# Altium PCB Sensor_Voltage_V1.PcbDoc
Units mm, origin at the board's own origin, x right, y up, seen from the top; angles counter-clockwise.
Board outline 59.5 x 69.4 mm, 2 copper layers (Top Layer, Bottom Layer), stack 1.58 mm thick; 129 components, 23 nets, 307 pads, 33 vias.
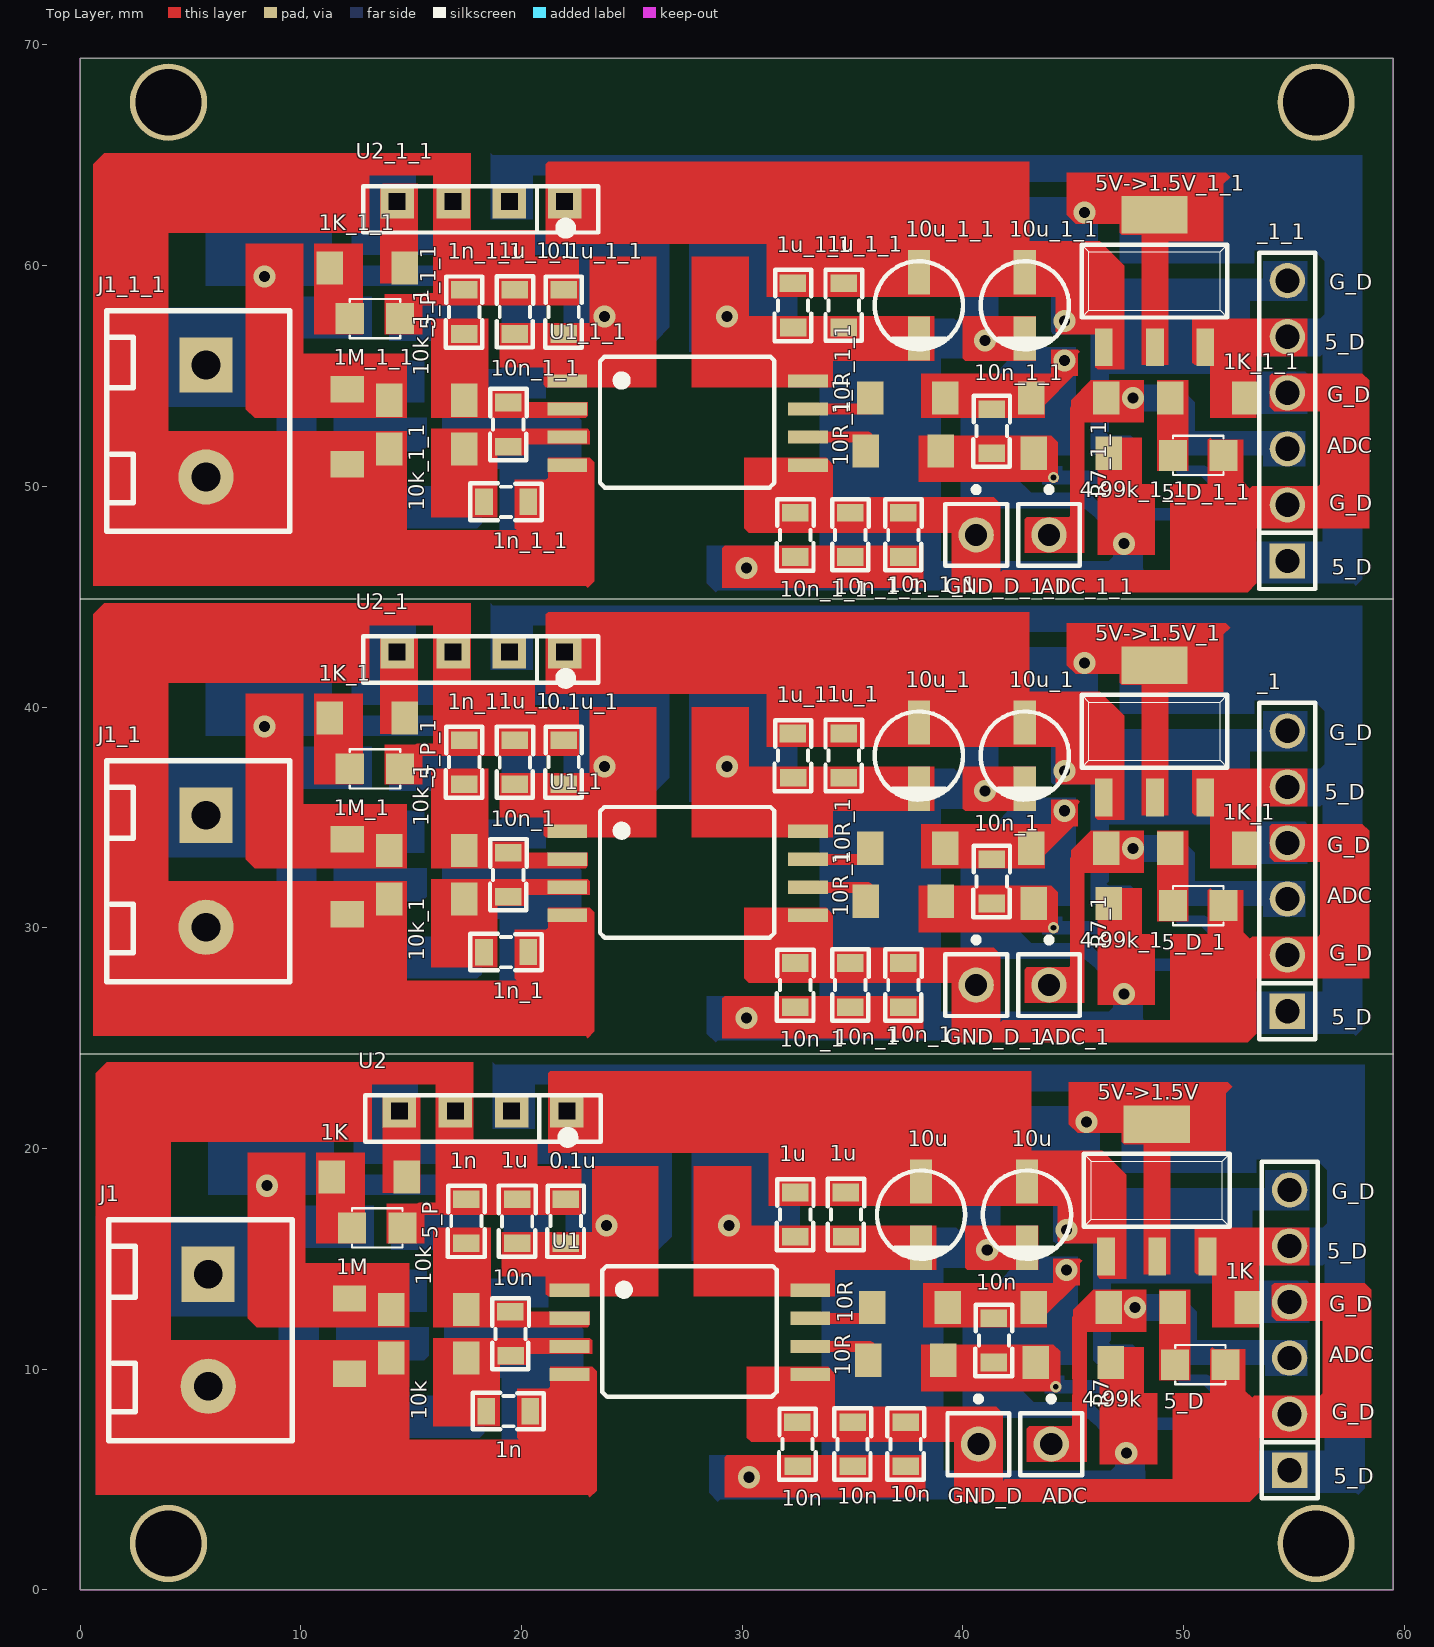
[diagram p0: Top Layer view]
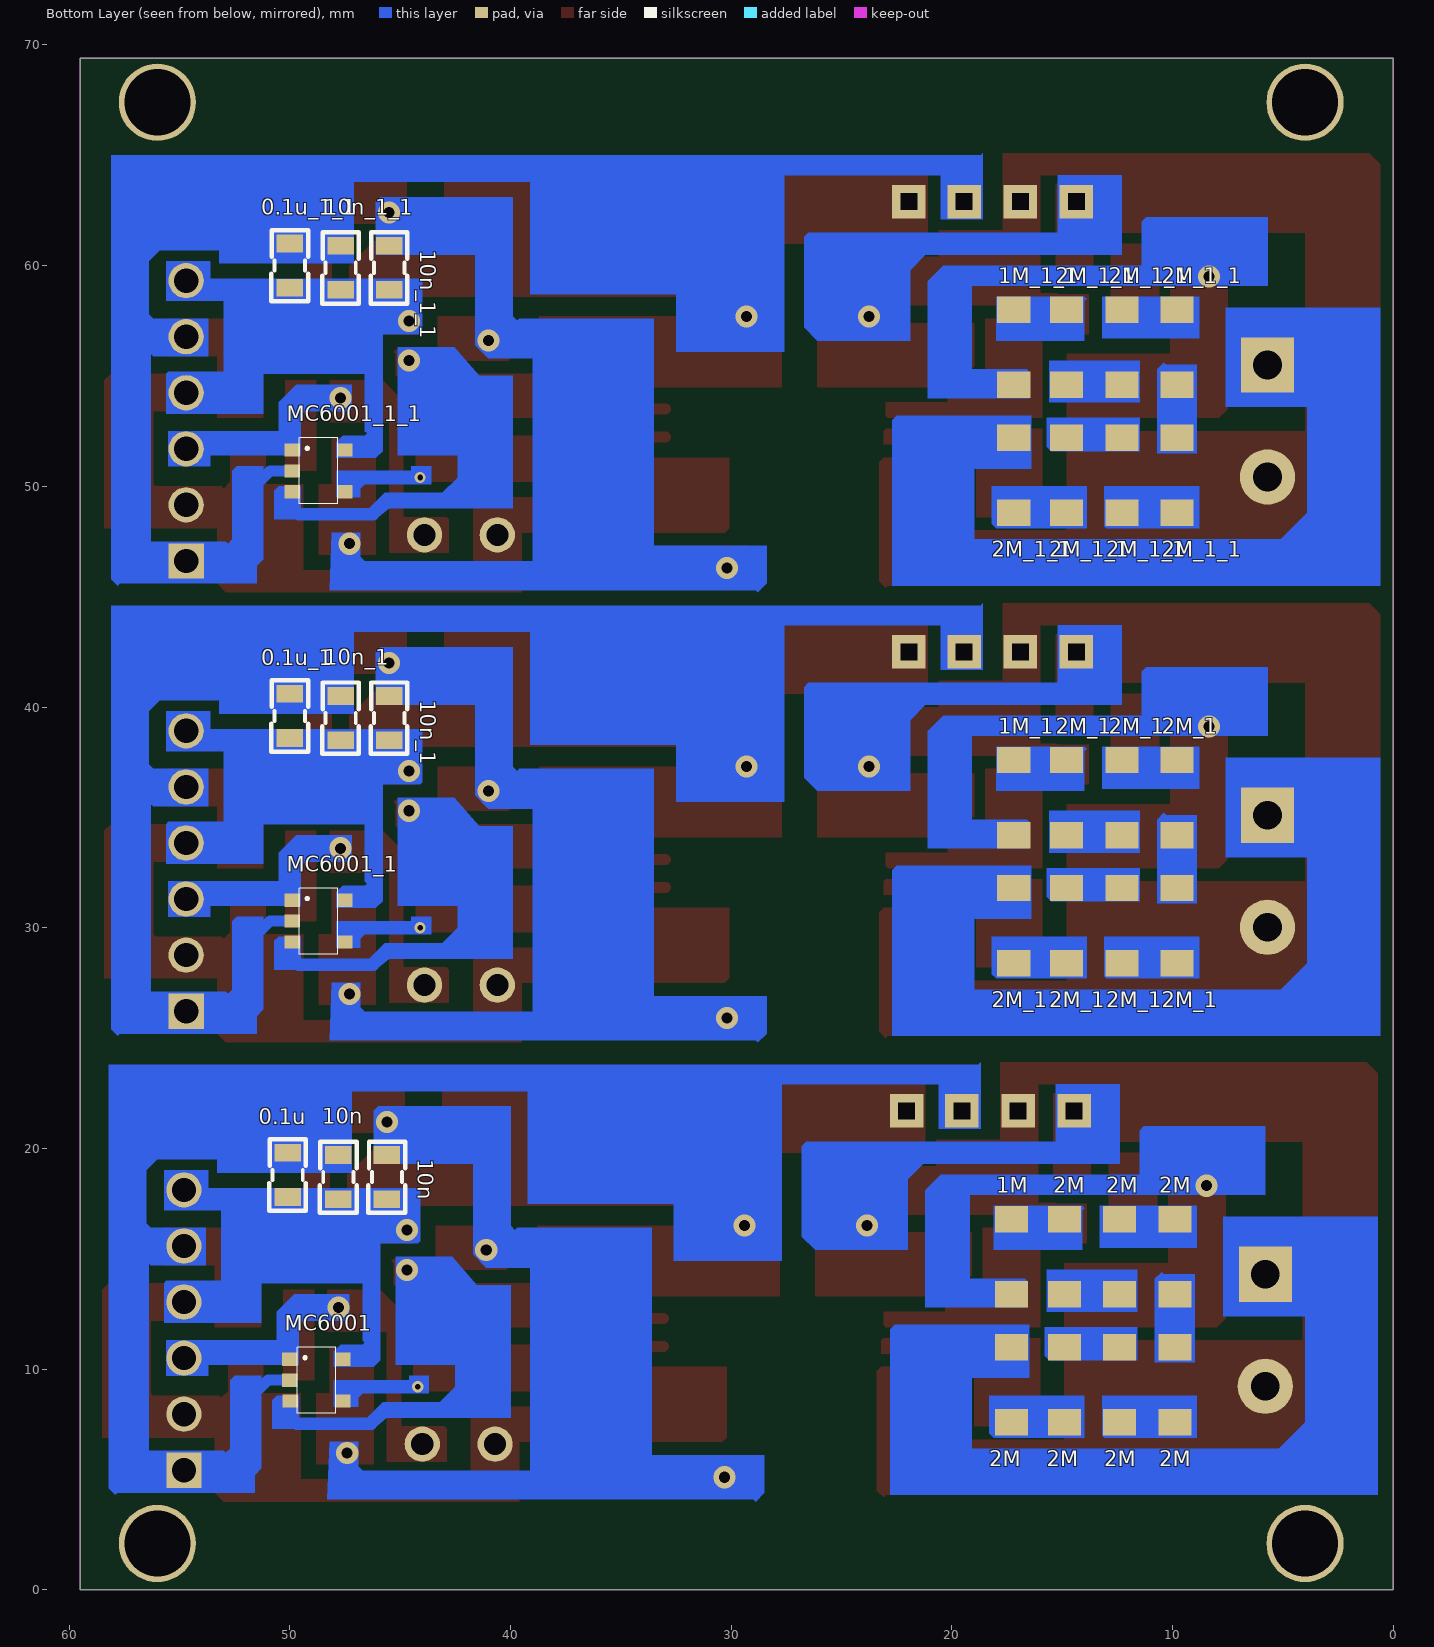
[diagram p1: Bottom Layer view, seen from below]
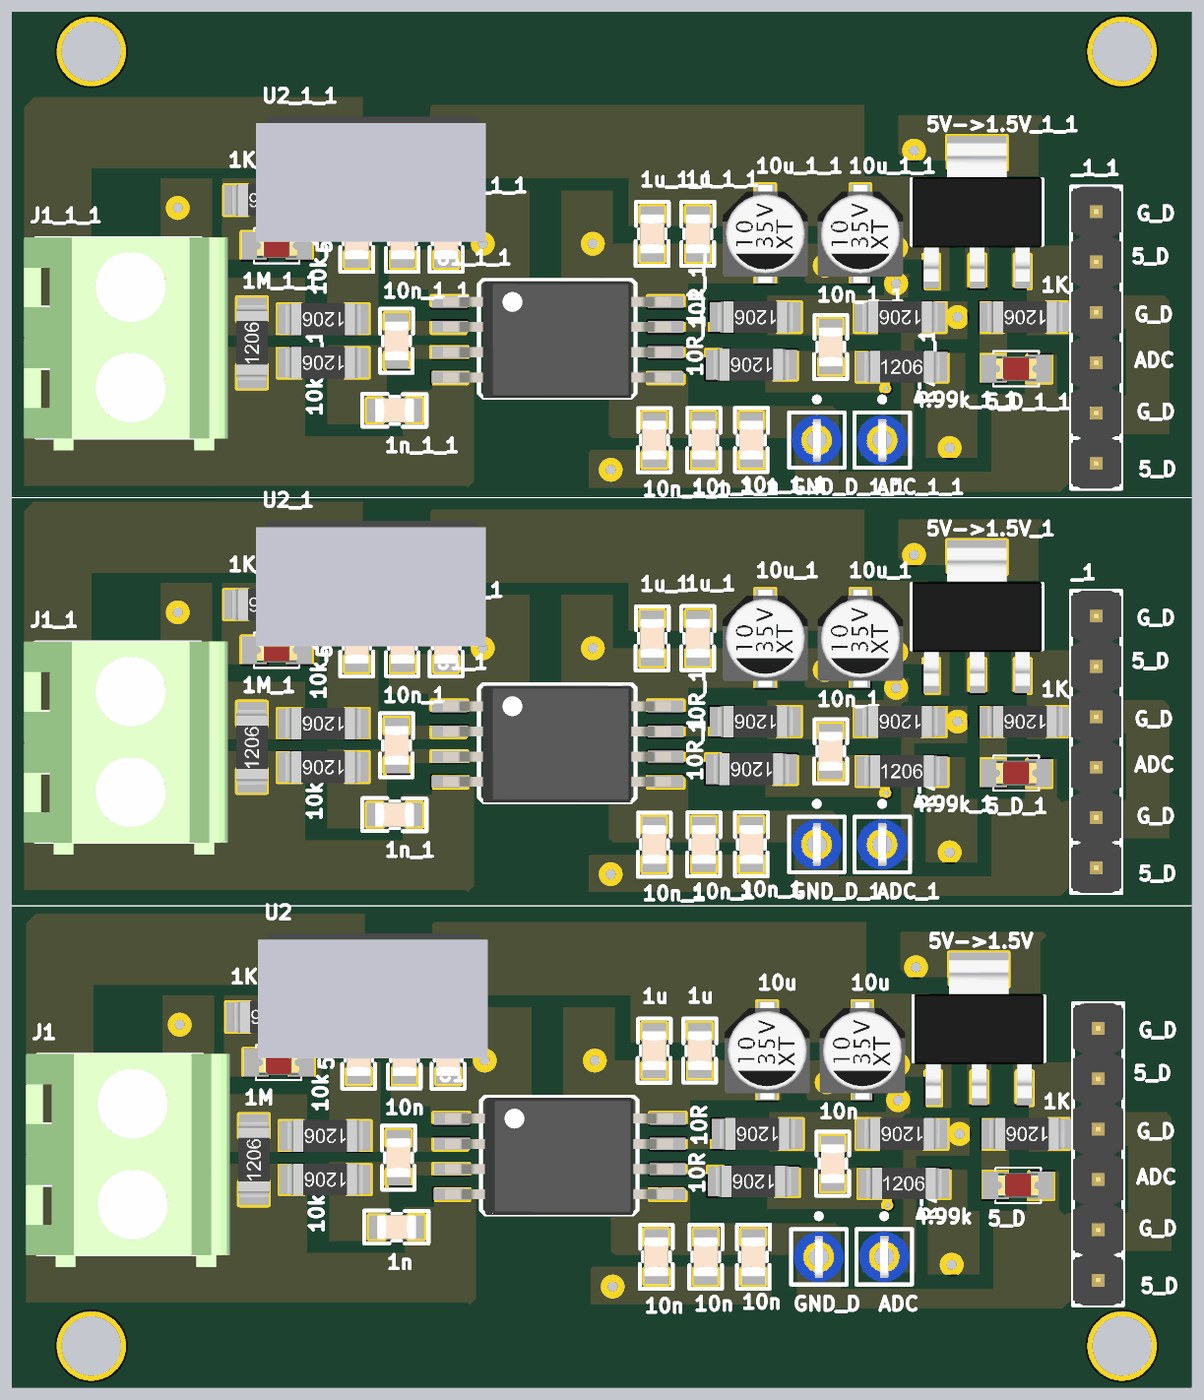
[diagram p2: 3D render of the assembled board from above, using the file's embedded part models]
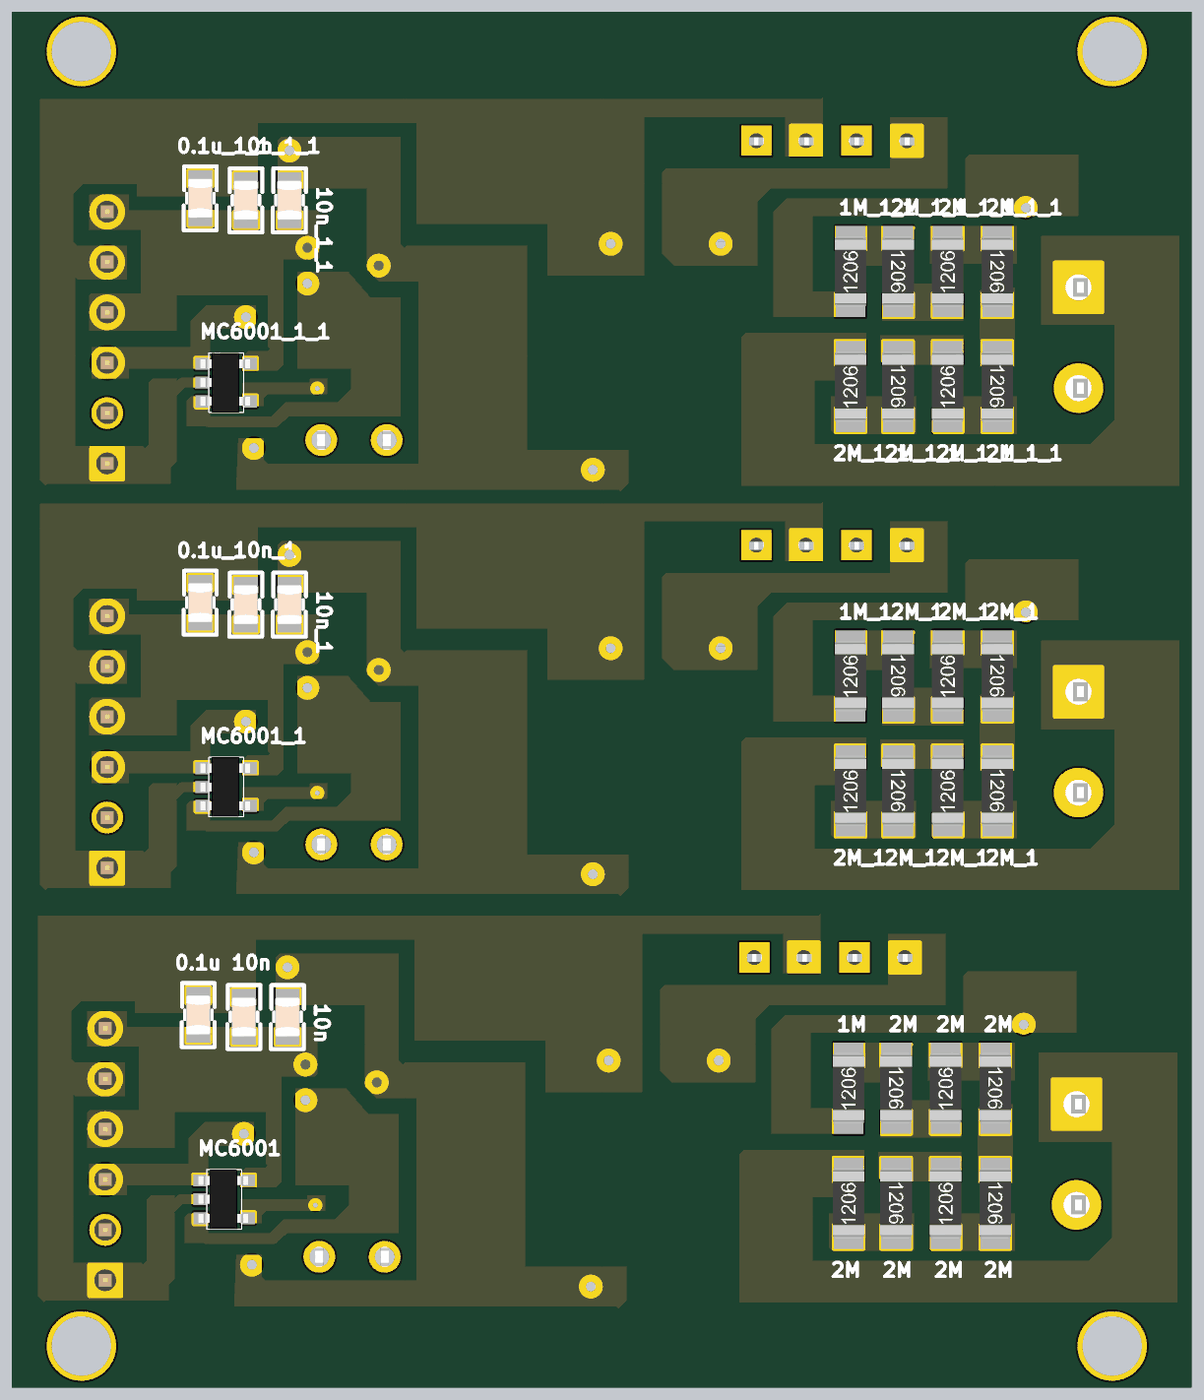
[diagram p3: 3D render of the assembled board from below, using the file's embedded part models]

## Layer stack, top to bottom
Top Solder: solder mask 0.01, Solder Resist, Dk 3.5
Top Layer: signal copper 0.035
Dielectric 1: dielectric 1.51, FR-4, Dk 4.8
Bottom Layer: signal copper 0.035
Bottom Solder: solder mask 0.01, Solder Resist, Dk 3.5

## Board outline
0,0 0,69.4 59.5,69.4 59.5,0

## Design rules (kind name [scope] priority, off if disabled: settings)
Clearance [All] p1: gap=0.399
PolygonConnect [All] p1: connectstyle=Relief reliefconductorwidth=0.254 reliefentries=4 polygonreliefangle="90 Angle" airgapwidth=0.254
RoutingVias [All] p1: holewidth=0.711 width=1.27 viastyle="Through Hole" minholewidth=0.711 minwidth=1.27 maxholewidth=0.711 maxwidth=1.27
SolderMaskExpansion [All] p1: expansion=0.102
Width [All] p1: maxlimit=2 minlimit=0.5 preferedwidth=0.5
30 further rules are at their usual default settings.

## Classes and differential pairs
component class Sensor_V1: 0.1u 1K 1M 1n 1u 2M 4.99k 5_D 5_P 5V->1.5V 10k 10K 10n 10R 10u C2 C4 C6 C8 C9 C11 C12 C13 C14 GND_D J1 JP3 MC6001 R4 R5 R7 R9 R10 R16 U1 U2 ""

## Components (designator, comment, footprint, x,y, rotation, side; value= is the part's Value field where it differs from the comment)
0.1u "0.1uF" "Tu 0805_N" 50.103,18.8 r90 bottom (schematic designator C2)
0.1u "0.1uF" "Tu 0805_N" 22,16.7 r90 top (schematic designator C1)
0.1u_1 "0.1uF" "Tu 0805_N" 21.9,37.5 r90 top (schematic designator C1)
0.1u_1 "0.1uF" "Tu 0805_N" 50.003,39.6 r90 bottom (schematic designator C2)
0.1u_1_1 "0.1uF" "Tu 0805_N" 50.003,60 r90 bottom (schematic designator C2)
0.1u_1_1 "0.1uF" "Tu 0805_N" 21.9,57.9 r90 top (schematic designator C1)
1K "10K" RES1206 13.1,18.7 r180 top (schematic designator R17)
1K "10K" RES1206 51.2,12.8 r180 top (schematic designator R16)
1K_1 "10K" RES1206 51.1,33.6 r180 top (schematic designator R16)
1K_1 "10K" RES1206 13,39.5 r180 top (schematic designator R17)
1K_1_1 "10K" RES1206 13,59.9 r180 top (schematic designator R17)
1K_1_1 "10K" RES1206 51.1,54 r180 top (schematic designator R16)
1M "1M" RES1206 12.2,11.5 r90 top (schematic designator R?)
1M "1M" RES1206 17.3,15.1 r90 bottom (schematic designator R6)
1M_1 "1M" RES1206 17.2,35.9 r90 bottom (schematic designator R6)
1M_1 "1M" RES1206 12.1,32.3 r90 top (schematic designator R?)
1M_1_1 "1M" RES1206 12.1,52.7 r90 top (schematic designator R?)
1M_1_1 "1M" RES1206 17.2,56.3 r90 bottom (schematic designator R6)
1n "1nF" "Tu 0805_N" 17.497,16.7 r90 top (schematic designator C6)
1n "1nF" "Tu 0805_N" 19.4,8.1 r0 top (schematic designator C5)
1n_1 "1nF" "Tu 0805_N" 19.3,28.9 r0 top (schematic designator C5)
1n_1 "1nF" "Tu 0805_N" 17.397,37.5 r90 top (schematic designator C6)
1n_1_1 "1nF" "Tu 0805_N" 17.397,57.9 r90 top (schematic designator C6)
1n_1_1 "1nF" "Tu 0805_N" 19.3,49.3 r0 top (schematic designator C5)
1u "1uF" "Tu 0805_N" 34.7,17 r270 top (schematic designator C9)
1u "1uF" "Tu 0805_N" 32.397,17 r90 top (schematic designator C4)
1u "1uF" "Tu 0805_N" 19.8,16.7 r270 top (schematic designator C3)
1u_1 "1uF" "Tu 0805_N" 19.7,37.5 r270 top (schematic designator C3)
1u_1 "1uF" "Tu 0805_N" 32.297,37.8 r90 top (schematic designator C4)
1u_1 "1uF" "Tu 0805_N" 34.6,37.8 r270 top (schematic designator C9)
1u_1_1 "1uF" "Tu 0805_N" 34.6,58.2 r270 top (schematic designator C9)
1u_1_1 "1uF" "Tu 0805_N" 32.297,58.2 r90 top (schematic designator C4)
1u_1_1 "1uF" "Tu 0805_N" 19.7,57.9 r270 top (schematic designator C3)
2M "2M" RES1206 17.3,9.3 r90 bottom (schematic designator R14)
2M "2M" RES1206 9.9,15.1 r270 bottom (schematic designator R13)
2M "2M" RES1206 14.9,9.3 r270 bottom (schematic designator R12)
2M "2M" RES1206 12.4,15.1 r90 bottom (schematic designator R11)
2M "2M" RES1206 12.4,9.3 r90 bottom (schematic designator R10)
2M "2M" RES1206 14.9,15.1 r270 bottom (schematic designator R9)
2M "2M" RES1206 9.9,9.3 r270 bottom (schematic designator R8)
2M_1 "2M" RES1206 9.8,30.1 r270 bottom (schematic designator R8)
2M_1 "2M" RES1206 14.8,35.9 r270 bottom (schematic designator R9)
2M_1 "2M" RES1206 12.3,30.1 r90 bottom (schematic designator R10)
2M_1 "2M" RES1206 12.3,35.9 r90 bottom (schematic designator R11)
2M_1 "2M" RES1206 14.8,30.1 r270 bottom (schematic designator R12)
2M_1 "2M" RES1206 9.8,35.9 r270 bottom (schematic designator R13)
2M_1 "2M" RES1206 17.2,30.1 r90 bottom (schematic designator R14)
2M_1_1 "2M" RES1206 17.2,50.5 r90 bottom (schematic designator R14)
2M_1_1 "2M" RES1206 9.8,56.3 r270 bottom (schematic designator R13)
2M_1_1 "2M" RES1206 14.8,50.5 r270 bottom (schematic designator R12)
2M_1_1 "2M" RES1206 12.3,56.3 r90 bottom (schematic designator R11)
2M_1_1 "2M" RES1206 12.3,50.5 r90 bottom (schematic designator R10)
2M_1_1 "2M" RES1206 14.8,56.3 r270 bottom (schematic designator R9)
2M_1_1 "2M" RES1206 9.8,50.5 r270 bottom (schematic designator R8)
4.99k "4.99k" RES1206 45,10.3 r0 top (schematic designator R15)
4.99k_1 "4.99k" RES1206 44.9,31.1 r0 top (schematic designator R15)
4.99k_1_1 "4.99k" RES1206 44.9,51.5 r0 top (schematic designator R15)
5_D "LED 0805" LED-0805-Red 49.614,10.2 r0 top (schematic designator L1)
5_D_1 "LED 0805" LED-0805-Red 49.514,31 r0 top (schematic designator L1)
5_D_1_1 "LED 0805" LED-0805-Red 49.514,51.4 r0 top (schematic designator L1)
5_P "LED 0805" LED-0805-Red 12.314,16.4 r0 top (schematic designator L2)
5_P_1 "LED 0805" LED-0805-Red 12.214,37.2 r0 top (schematic designator L2)
5_P_1_1 "LED 0805" LED-0805-Red 12.214,57.6 r0 top (schematic designator L2)
5V->1.5V "AMS1117_1.5V" TO-252 48.78,18.1 r0 top (schematic designator U4)
5V->1.5V_1 "AMS1117_1.5V" TO-252 48.68,38.9 r0 top (schematic designator U4)
5V->1.5V_1_1 "AMS1117_1.5V" TO-252 48.68,59.3 r0 top (schematic designator U4)
10k "10K" RES1206 15.8,12.7 r180 top (schematic designator R5)
10k "10K" RES1206 15.8,10.5 r180 top (schematic designator R1)
10k_1 "10K" RES1206 15.7,31.3 r180 top (schematic designator R1)
10k_1 "10K" RES1206 15.7,33.5 r180 top (schematic designator R5)
10k_1_1 "10K" RES1206 15.7,53.9 r180 top (schematic designator R5)
10k_1_1 "10K" RES1206 15.7,51.7 r180 top (schematic designator R1)
10n "10nF" "Tu 0805_N" 35,6.6 r270 top (schematic designator C16)
10n "10nF" "Tu 0805_N" 37.403,6.6 r270 top (schematic designator C15)
10n "10nF" "Tu 0805_N" 45.603,18.7 r90 bottom (schematic designator C14)
10n "10nF" "Tu 0805_N" 47.803,18.7 r90 bottom (schematic designator C13)
10n "1uF" "Tu 0805_N" 32.5,6.6 r90 top (schematic designator C10)
10n "10nF" "Tu 0805_N" 19.5,11.6 r270 top (schematic designator C8)
10n "10nF" "Tu 0805_N" 41.4,11.3 r90 top (schematic designator C7)
10n_1 "10nF" "Tu 0805_N" 41.3,32.1 r90 top (schematic designator C7)
10n_1 "10nF" "Tu 0805_N" 19.4,32.4 r270 top (schematic designator C8)
10n_1 "1uF" "Tu 0805_N" 32.4,27.4 r90 top (schematic designator C10)
10n_1 "10nF" "Tu 0805_N" 47.703,39.5 r90 bottom (schematic designator C13)
10n_1 "10nF" "Tu 0805_N" 45.503,39.5 r90 bottom (schematic designator C14)
10n_1 "10nF" "Tu 0805_N" 37.303,27.4 r270 top (schematic designator C15)
10n_1 "10nF" "Tu 0805_N" 34.9,27.4 r270 top (schematic designator C16)
10n_1_1 "10nF" "Tu 0805_N" 34.9,47.8 r270 top (schematic designator C16)
10n_1_1 "10nF" "Tu 0805_N" 37.303,47.8 r270 top (schematic designator C15)
10n_1_1 "10nF" "Tu 0805_N" 45.503,59.9 r90 bottom (schematic designator C14)
10n_1_1 "10nF" "Tu 0805_N" 47.703,59.9 r90 bottom (schematic designator C13)
10n_1_1 "1uF" "Tu 0805_N" 32.4,47.8 r90 top (schematic designator C10)
10n_1_1 "10nF" "Tu 0805_N" 19.4,52.8 r270 top (schematic designator C8)
10n_1_1 "10nF" "Tu 0805_N" 41.3,52.5 r90 top (schematic designator C7)
10R "10K" RES1206 37.4,10.4 r180 top (schematic designator R4)
10R "10K" RES1206 37.6,12.8 r180 top (schematic designator R2)
10R_1 "10K" RES1206 37.5,33.6 r180 top (schematic designator R2)
10R_1 "10K" RES1206 37.3,31.2 r180 top (schematic designator R4)
10R_1_1 "10K" RES1206 37.3,51.6 r180 top (schematic designator R4)
10R_1_1 "10K" RES1206 37.5,54 r180 top (schematic designator R2)
10u "10uF_16V" tu_4x5.4mm 38.1,17 r90 top (schematic designator C12)
10u "10uF_16V" tu_4x5.4mm 42.9,17 r90 top (schematic designator C11)
10u_1 "10uF_16V" tu_4x5.4mm 42.8,37.8 r90 top (schematic designator C11)
10u_1 "10uF_16V" tu_4x5.4mm 38,37.8 r90 top (schematic designator C12)
10u_1_1 "10uF_16V" tu_4x5.4mm 38,58.2 r90 top (schematic designator C12)
10u_1_1 "10uF_16V" tu_4x5.4mm 42.8,58.2 r90 top (schematic designator C11)
_1 "JP 1x6 2.54" "JP 1X6 DT" 54.7,26.22 r90 top (schematic designator JP1)
_1_1 "JP 1x6 2.54" "JP 1X6 DT" 54.7,46.62 r90 top (schematic designator JP1)
ADC "JP 1x1 2.54" test_point 44,6.6 r0 top (schematic designator JP3)
ADC_1 "JP 1x1 2.54" test_point 43.9,27.4 r0 top (schematic designator JP3)
ADC_1_1 "JP 1x1 2.54" test_point 43.9,47.8 r0 top (schematic designator JP3)
GND_D "JP 1x1 2.54" test_point 40.7,6.6 r0 top (schematic designator JP2)
GND_D_1 "JP 1x1 2.54" test_point 40.6,27.4 r0 top (schematic designator JP2)
GND_D_1_1 "JP 1x1 2.54" test_point 40.6,47.8 r0 top (schematic designator JP2)
J1 "domino" domino_2pin_5.08mm 5.8,11.76 r270 top
J1_1 "domino" domino_2pin_5.08mm 5.7,32.56 r270 top (schematic designator J1)
J1_1_1 "domino" domino_2pin_5.08mm 5.7,52.96 r270 top (schematic designator J1)
JP1 "JP 1x6 2.54" "JP 1X6 DT" 54.8,5.42 r90 top
MC6001 "MCP6001" SOT23_5 48.8,9.5 r180 bottom (schematic designator U?)
MC6001_1 "MCP6001" SOT23_5 48.7,30.3 r180 bottom (schematic designator U?)
MC6001_1_1 "MCP6001" SOT23_5 48.7,50.7 r180 bottom (schematic designator U?)
R7 "4.99K" RES1206 44.9,12.8 r180 top
R7_1 "4.99K" RES1206 44.8,33.6 r180 top (schematic designator R7)
R7_1_1 "4.99K" RES1206 44.8,54 r180 top (schematic designator R7)
U1 "AMC_1301" SOIC_8_SO8W 28,12.3 r0 top
U1_1 "AMC_1301" SOIC_8_SO8W 27.9,33.1 r0 top (schematic designator U1)
U1_1_1 "AMC_1301" SOIC_8_SO8W 27.9,53.5 r0 top (schematic designator U1)
U2 "DC_DC_5V" B0505S/D-1W 18.2,21.4 r0 top
U2_1 "DC_DC_5V" B0505S/D-1W 18.1,42.2 r0 top (schematic designator U2)
U2_1_1 "DC_DC_5V" B0505S/D-1W 18.1,62.6 r0 top (schematic designator U2)

## Footprints (in the part's own frame and the unit in brackets; to place one, negate y for a bottom-side part, rotate by r counter-clockwise, add the part's x,y. Pads: shape width x height; smd on the part's side, far side on the other; paste and mask are expansions set on the pad)
B0505S/D-1W [mm] "B0512S/D-1W"
  rect 1.52x1.52 hole 0.75 square: 1(3.85,0.3) 2(1.35,0.3) 3(-1.2,0.3) 4(-3.74,0.3)
  silkscreen extent -5.28,-1.12 5.38,1, body extent -5.8,-4.8 5.8,1.52, height 18.66
domino_2pin_5.08mm [mm]
  rect 2.5x2.4 hole 1.3: 1(-2.54,0)
  round 2.5 hole 1.3: 2(2.54,0)
  silkscreen extent -5,-4.5 5,3.8, body extent -5.08,-5.1 5.68,5.2, height 13.59
"JP 1X6 DT" [mm] "6 pins, 1 row, straight, gold plating"
  rect 1.6x1.6 hole 1.1: 1(0,0)
  round 1.6 hole 1.1: 2(2.54,0) 3(5.08,0) 4(7.62,0) 5(10.16,0) 6(12.7,0)
  silkscreen extent -1.27,-1.27 13.97,1.27, body extent -1.27,-1.27 13.97,1.27, height 8.54
LED-0805-Red [mil]
  rect 50x55 smd: 1(0,0) 2(90,0)
  silkscreen extent 0,-35 90,35, body extent 5,-25 85,25, height 43
RES1206 [mm]
  rect 1.2x1.5 smd: 1(-1.7,0) 2(1.7,0)
  body extent -1.9,-0.8 1.9,0.8, height 0.6
SOIC_8_SO8W [mm] "AMC_1301"
  rect 1.8x0.6 smd: 1(-5.832,1.27) 2(-5.832,0) 3(-5.832,-1.27) 4(-5.832,-2.54) 5(5.08,-2.54) 6(5.08,-1.27) 7(5.08,0) 8(5.08,1.27)
  silkscreen extent -4.35,-3.55 3.55,2.37, body extent -6.15,-3.58 5.35,2.32, height 2.7
SOT23_5 [mm]
  rect 0.7x0.6 smd: 1(-1.2,0.95) 2(-1.2,0) 3(-1.19,-0.95) 4(1.2,-0.95) 5(1.2,0.95)
  silkscreen extent -0.88,-1.5 0.87,1.5, body extent -1.29,-1.5 1.21,1.5, height 1.1
test_point [mm] "1pins, 1 row, straight, gold plating"
  round 1.6 hole 1: 1(0,0)
  silkscreen extent -1.4,-1.4 1.4,2.17, body extent -1.27,-1.27 1.27,1.27, height 4.89
TO-252 [mm] "TO-252"
  rect 0.8x1.705 smd: 1(-2.3,-3) 2(0.02,-3) 3(2.3,-3)
  rect 3x1.705 smd: 2(0,3)
  silkscreen extent -3.3,-1.65 3.3,1.65, body extent -3.25,-3.5 3.25,3.46, height 1.7
"Tu 0805_N" [mm] "Compoment SMD 80x50mil"
  rect 0.8x1.2 smd: 1(-1,-0.003) 2(1,0)
  silkscreen extent -1.62,-0.83 1.61,0.83, body extent -1,-0.62 1,0.63, height 1.26
tu_4x5.4mm [mm]
  rect 2x1 smd: 1(-1.5,0) 2(1.5,0)
  silkscreen extent -2,-2 2,2, body extent -2.45,-2.15 2.45,2.15, height 5.4

## Part data
0.1u 0.1u 0.1u_1 0.1u_1 0.1u_1_1 0.1u_1_1 1n 1n 1n_1 1n_1 1n_1_1 1n_1_1 1u 1u 1u 1u_1 1u_1 1u_1 1u_1_1 1u_1_1 1u_1_1 10n 10n 10n 10n 10n 10n 10n 10n_1 10n_1 10n_1 10n_1 10n_1 10n_1 10n_1 10n_1_1 10n_1_1 10n_1_1 10n_1_1 10n_1_1 10n_1_1 10n_1_1: library part cap_0805
1K 1K 1K_1 1K_1 1K_1_1 1K_1_1 1M 1M 1M_1 1M_1 1M_1_1 1M_1_1 2M 2M 2M 2M 2M 2M 2M 2M_1 2M_1 2M_1 2M_1 2M_1 2M_1 2M_1 2M_1_1 2M_1_1 2M_1_1 2M_1_1 2M_1_1 2M_1_1 2M_1_1 4.99k 4.99k_1 4.99k_1_1 10k 10k 10k_1 10k_1 10k_1_1 10k_1_1 10R 10R 10R_1 10R_1 10R_1_1 10R_1_1 R7 R7_1 R7_1_1: library part 311-0.0GRTR-ND
5_D 5_D_1 5_D_1_1 5_P 5_P_1 5_P_1_1: library part "LED 0805 Do", "Dán"
5V->1.5V 5V->1.5V_1 5V->1.5V_1_1: library part AMS1117CD, "AMS1117CD"
10u 10u 10u_1 10u_1 10u_1_1 10u_1_1: library part capacitor_electric, "capacitor_electric"
_1 _1_1 JP1: library part "JP 1x6 2.54 Duc Thang", "C?m"
ADC ADC_1 ADC_1_1 GND_D GND_D_1 GND_D_1_1: library part "JP 1x1 2.54 Duc Thang", "C?m"
U2 U2_1 U2_1_1: library part DC_DC_5v

## Free pads (board coordinates)
  round 3.5 hole 3: 2(4,2.1) 2(4,67.4) 2(56,2.1) 2(56,67.4)

## Via types
v1: diameter 1, hole 0.5, Top Layer to Bottom Layer, 30 vias
v2: diameter 0.508, hole 0.254, Top Layer to Bottom Layer, 3 vias

## Nets (pads, with @x,y where several pads share a name; then routed paths per layer and width w, separated by ;. In a path a pad name is that pad's centre, name@x,y a point inside that pad or via, vN(x,y) a via of type N, cw(c..) or ccw(c..) an arc to the next point about the centre after c; other vN are vias at no path point)
GND_D: 0.1u.1@50.1,17.8 1u.1@34.697,18 1u.2@32.397,18 5_D.2 5V->1.5V.1 10n.1@34.997,7.6 10n.1@37.4,7.6 10n.1@45.6,17.7 10n.1@47.8,17.7 10n.2@32.5,7.6 10u.2 GND_D.1 JP1.2 JP1.4 JP1.6 MC6001.5 U1.5 U2.1 | length 102.3
  Top Layer w0.5: U2.1 31.8,21.7 32.397,21.103 32.397,18 34.696,18 37.6,18 38.1,18.5 42.9,18.5 46,18.5 46.48,18.02 46.48,16.4 ; U1.5 33.08,7.62 33.1,7.6 34.997,7.6 37.4,7.6 40.5,7.6 40.7,7.4 GND_D.1 40.7,5.1 41.2,4.6 52.3,4.6 52.8,5.1 52.8,7.96 ; v1(44.7,16.3) 44.8,16.4 46.48,16.4 ; 5V->1.5V.1 46.48,16.4 ; 5_D.2@51.5,10.2 51.5,8.2 51.74,7.96 52.8,7.96 ; JP1.4@54.7,13.04 JP1.4 56.26,13.04 56.6,12.7 56.6,8.6 55.96,7.96 JP1.2 52.8,7.96
  Bottom Layer w0.5: v1(44.7,16.3) 44.7,17.2 45.2,17.7 45.6,17.7 45.7,17.8 50.1,17.8 51.7,17.8 ; MC6001.5 46.65,10.45 46.35,10.75 46.35,17.7 10n.1@47.8,17.7 ; JP1.6@54.4,18.12 54.08,17.8 51.7,17.8 ; JP1.4@54.7,13.04 52.2,13.04 51.7,13.54 51.7,17.8
GND_P: 0.1u.2@22,17.7 1M.1@12.2,9.8 1n.2 1u.1@19.797,17.7 5_P.2 10k.2@14.1,10.5 J1.2 U1.4 U2.3 | length 74.8
  Top Layer w0.5: 13.3,23.3 13.3,23.2 ; 10k.2@14.1,10.5 13.4,9.8 12.2,9.8 11.62,9.22 J1.2 ; 5_P.2 14.6,16.5 15.4,17.3 16.3,17.3 16.7,17.7 1n.2@17.497,17.7 ; 0.1u.2@22,17.7 19.797,17.7 1n.2@17.497,17.7 ; U1.4 22.168,8.368 21.9,8.1 20.4,8.1 20.4,6.41 20.07,6.08 6.42,6.08 5.8,6.7 J1.2 ; J1.2 3.38,9.22 2.8,9.8 2.8,21.6 4.4,23.2 13.3,23.2 ; 13.3,23.2 16.7,23.2 17,22.9 U2.3 17,18.197 1n.2@17.497,17.7
NetC1_1: 0.1u.1@22.003,15.7 1K.1@14.8,18.7 1u.2@19.8,15.7 U1.1 U2.4 | length 23.2
  Top Layer w0.5: U2.4 14.46,19.04 1K.1@14.8,18.7 ; 1u.2@19.8,15.7 0.1u.1@22.003,15.7 ; U1.1 22.168,13.739 22.003,13.903 0.1u.1@22.003,15.7 ; v1(23.85,16.5) 23.85,16.02 23.53,15.7 0.1u.1@22.003,15.7
  Bottom Layer w0.5: U2.4 14.46,20.14 14.86,19.74 21.83,19.74 23.85,17.72 v1(23.85,16.5)
NetC2_2: 0.1u.2@50.103,19.8 1K.1@52.9,12.8 1u.1@32.4,16 1u.2@34.7,16 5V->1.5V.3 10n.2@47.803,19.7 10u.1@38.1,15.5 JP1.1 JP1.5 MC6001.2 U1.8 U2.2 | length 101.4
  Top Layer w0.5: v1(29.4,16.5) 29.4,16.3 29.7,16 32.4,16 1u.2@34.7,16 ; U1.8 33.08,15.98 33.1,16 1u.2@34.7,16 ; 10u.1@38.1,15.5 37.6,16 1u.2@34.7,16 ; 5V->1.5V.3 51.38,15.4 52.4,15.4 ; 1K.1@52.6,12.8 52.4,13 52.4,15.4 ; JP1.5@54.4,15.58 54.22,15.4 52.4,15.4
  Bottom Layer w0.5: U2.2 19.55,23.05 19.85,23.35 29.4,23.35 ; v1(29.4,16.5) 29.4,23.35 ; 10n.2@47.803,19.7 50.003,19.7 50.103,19.8 54.5,19.8 ; MC6001.2 51,9.5 51.88,8.62 51.88,6.02 52.48,5.42 JP1.1@54.4,5.42 ; JP1.1@54.7,5.42 JP1.1@54.4,5.42 ; JP1.5@54.7,15.58 JP1.5 56.68,15.58 ; 29.4,23.35 53.65,23.35 54.5,22.5 54.5,19.8 ; JP1.1@54.4,5.42 54.6,5.22 56.52,5.22 56.9,5.6 56.9,19.1 56.2,19.8 54.5,19.8
NetC5_1: 1n.1@18.4,8.097 10k.1@17.5,10.5 10n.2@19.5,10.6 U1.3 | length 7.7
  Top Layer w0.5: 1n.1@18.4,8.097 17.5,8.996 17.5,10.5 19.4,10.5 19.5,10.6 19.93,11.03 U1.3
NetC6_1: 1n.1@17.5,15.7 10k.1@17.5,12.7 10n.1@19.497,12.6 U1.2 | length 7.8
  Top Layer w0.5: 1n.1@17.5,15.7 17.5,12.7 19.397,12.7 19.497,12.6 19.797,12.3 U1.2
NetC7_1: 4.99k.1 10n.1@41.403,10.3 10R.1@39.1,10.4 MC6001.4 | length 8.7
  Top Layer w0.5: 39.8,10.4 41.803,10.4 41.903,10.3 4.99k.1 43.3,10.1 v2(44.2,9.2)
  Bottom Layer w0.5: v2(44.2,9.2) 46.95,9.2 MC6001.4
NetC7_2: 10n.2@41.4,12.3 10R.1@39.3,12.8 MC6001.3 R7.2 | length 24.2
  Top Layer w0.5: 10R.1@39.5,12.3 40.3,12.3 ; 40.3,12.3 41.4,12.3 42.7,12.3 R7.2 43.7,12.8 44.7,13.8 v1(44.7,14.5)
  Bottom Layer w0.5: v1(44.7,14.5) 42.6,14.5 41.6,13.5 41.6,9.5 42.904,8.196 44.616,8.196 44.62,8.2 45.7,8.2 46.3,7.6 46.3,7.5 49.7,7.5 49.99,7.79 MC6001.3
NetC10_1: 4.99k.2 5V->1.5V.2 10n.1@32.503,5.6 10n.2@35,5.6 10n.2@37.403,5.6 10n.2@45.603,19.7 10u.1@42.9,15.5 | length 67
  Top Layer w0.5: v1(30.3,5.1) 30.8,5.6 32.503,5.6 35,5.6 10n.2@37.403,5.6 ; v1(41.1,15.4) 41.2,15.5 10u.1@42.9,15.5 ; v1(45.603,21.203) 45.603,21.197 45.7,21.1 48.78,21.1 48.78,15.12 5V->1.5V.2@48.8,15.1 ; v1@47.3,6.3 47.4,6.4 47.4,10.3
  Bottom Layer w0.5: v1(30.3,5.1) 35.2,5.1 ; 10n.2@45.603,19.7 v1(45.603,21.203) 42.103,21.203 41.1,20.2 v1(41.1,15.4) 36.5,15.4 35.2,14.1 35.2,5.1 ; v1(47.4,6.2) 47.4,5.6 46.9,5.1 35.2,5.1
NetJ1_1: 2M.2@17.3,11 J1.1 | length 37.2
  Bottom Layer w0.5: J1.1 3.79,14.3 3.22,13.73 3.22,7.51 5.07,5.66 20.81,5.66 21.8,6.65 21.8,10.2 21,11 2M.2@17.3,11
NetJP1_3: ADC.1 JP1.3 MC6001.1 R7.1 | length 18.4
  Top Layer w0.5: ADC.1 45.2,6.6 45.2,8.78 45.204,8.784 45.204,9.616 45.2,9.62 45.2,12.3 45.7,12.8 R7.1 v1(47.8,12.8)
  Bottom Layer w0.5: v1(47.8,12.8) 49.6,12.8 50,12.4 MC6001.1 54.35,10.45 JP1.3@54.4,10.5
NetL1_1: 1K.2@49.5,12.8 5_D.1 | length 2.6
  Top Layer w0.5: 1K.2@49.2,12.8 49.2,10.214 5_D.1@49.214,10.2
NetL2_1: 1K.2@11.4,18.7 5_P.1 | length 4.2
  Top Layer w0.5: 1K.2@11.4,18.7 11.4,17.314 ; 11.4,17.314 11.4,16.9 11.9,16.4 5_P.1 11.4,17.314
NetR2_2: 10R.2@35.9,12.8 U1.7 | length 3.3
  Top Layer w0.5: U1.7 35.9,12.3 10R.2@35.9,12.8
NetR4_2: 10R.2@35.7,10.4 U1.6 | length 3.7
  Top Layer w0.5: U1.6 35.77,11.03 35.8,11 10R.2@35.8,10
NetR5_2: 1M.1@17.3,13.4 1M.2@12.2,13.2 10k.2@14.1,12.7 | length 29.4
  Top Layer w0.5: v1(8.46,18.31) 8.46,13.74 9,13.2 12.2,13.2 12.7,12.7 10k.2@14.1,12.7
  Bottom Layer w0.5: v1(8.46,18.31) 19.25,18.31 20.29,17.27 20.29,14.03 19.66,13.4 1M.1@17.3,13.4
NetR6_2: 1M.2@17.3,16.8 2M.1@14.9,16.8 | length 2.4
  Bottom Layer w0.5: 2M.1@14.9,16.8 1M.2@17.3,16.8
NetR8_1: 2M.1@9.9,11 2M.2@9.9,13.4 | length 2.4
  Bottom Layer w0.5: 2M.1@9.9,11 2M.2@9.9,13.4
NetR8_2: 2M.1@12.4,7.6 2M.2@9.9,7.6 | length 2.5
  Bottom Layer w0.5: 2M.2@9.9,7.6 2M.1@12.4,7.6
NetR9_2: 2M.1@12.4,13.4 2M.2@14.9,13.4 | length 2.5
  Bottom Layer w0.5: 2M.1@12.4,13.4 2M.2@14.9,13.4
NetR10_2: 2M.1@14.9,11 2M.2@12.4,11 | length 2.5
  Bottom Layer w0.5: 2M.2@12.4,11 2M.1@14.9,11
NetR11_2: 2M.1@9.9,16.8 2M.2@12.4,16.8 | length 2.5
  Bottom Layer w0.5: 2M.1@9.9,16.8 2M.2@12.4,16.8
NetR12_2: 2M.1@17.3,7.6 2M.2@14.9,7.6 | length 2.4
  Bottom Layer w0.5: 2M.2@14.9,7.6 2M.1@17.3,7.6
pads on no net: 0.1u_1.1 0.1u_1.2 0.1u_1_1.1 0.1u_1_1.2 1K_1.1 1K_1.2 1K_1_1.1 1K_1_1.2 1M_1.1 1M_1.2 1M_1_1.1 1M_1_1.2 1n_1.1 1n_1.2 1n_1_1.1 1n_1_1.2 1u_1.1 1u_1.2 1u_1_1.1 1u_1_1.2 2M_1.1 2M_1.2 2M_1_1.1 2M_1_1.2 4.99k_1.1 4.99k_1.2 4.99k_1_1.1 4.99k_1_1.2 5_D_1.1 5_D_1.2 5_D_1_1.1 5_D_1_1.2 5_P_1.1 5_P_1.2 5_P_1_1.1 5_P_1_1.2 5V->1.5V_1.1 5V->1.5V_1.2 5V->1.5V_1.3 5V->1.5V_1_1.1 5V->1.5V_1_1.2 5V->1.5V_1_1.3 10k_1.1 10k_1.2 10k_1_1.1 10k_1_1.2 10n_1.1 10n_1.2 10n_1_1.1 10n_1_1.2 10R_1.1 10R_1.2 10R_1_1.1 10R_1_1.2 10u_1.1 10u_1.2 10u_1_1.1 10u_1_1.2 _1.1 _1.2 _1.3 _1.4 _1.5 _1.6 _1_1.1 _1_1.2 _1_1.3 _1_1.4 _1_1.5 _1_1.6 ADC_1.1 ADC_1_1.1 GND_D_1.1 GND_D_1_1.1 J1_1.1 J1_1.2 J1_1_1.1 J1_1_1.2 MC6001_1.1 MC6001_1.2 MC6001_1.3 MC6001_1.4 MC6001_1.5 MC6001_1_1.1 MC6001_1_1.2 MC6001_1_1.3 MC6001_1_1.4 MC6001_1_1.5 R7_1.1 R7_1.2 R7_1_1.1 R7_1_1.2 U1_1.1 U1_1.2 U1_1.3 U1_1.4 U1_1.5 U1_1.6 U1_1.7 U1_1.8 U1_1_1.1 U1_1_1.2 U1_1_1.3 U1_1_1.4 U1_1_1.5 U1_1_1.6 U1_1_1.7 U1_1_1.8 U2_1.1 U2_1.2 U2_1.3 U2_1.4 U2_1_1.1 U2_1_1.2 U2_1_1.3 U2_1_1.4
copper on no net: | length 1066.2
  Top Layer w0.5: v1(8.36,39.11) 8.36,34.54 8.9,34 12.1,34 12.6,33.5 14,33.5 ; v1(8.36,59.51) 8.36,54.94 8.9,54.4 12.1,54.4 12.6,53.9 14,53.9 ; 11.3,39.5 11.3,38.114 ; 11.3,59.9 11.3,58.514 ; 13.2,44.1 13.2,44 ; 13.2,64.5 13.2,64.4 ; 14,31.3 13.3,30.6 12.1,30.6 11.52,30.02 5.7,30.02 ; 14,51.7 13.3,51 12.1,51 11.52,50.42 5.7,50.42 ; 14.36,42.5 14.36,39.84 14.7,39.5 ; 14.36,62.9 14.36,60.24 14.7,59.9 ; 14.5,37.2 14.5,37.3 15.3,38.1 16.2,38.1 16.6,38.5 17.397,38.5 ; 14.5,57.6 14.5,57.7 15.3,58.5 16.2,58.5 16.6,58.9 17.397,58.9 ; 17.4,36.5 17.4,33.5 19.297,33.5 19.397,33.4 19.697,33.1 22.068,33.1 ; 17.4,56.9 17.4,53.9 19.297,53.9 19.397,53.8 19.697,53.5 22.068,53.5 ; 18.3,28.897 17.4,29.796 17.4,31.3 19.3,31.3 19.4,31.4 19.83,31.83 22.068,31.83 ; 18.3,49.297 17.4,50.196 17.4,51.7 19.3,51.7 19.4,51.8 19.83,52.23 22.068,52.23 ; 19.7,36.5 21.903,36.5 ; 19.7,56.9 21.903,56.9 ; 21.9,38.5 19.697,38.5 17.397,38.5 ; 21.9,58.9 19.697,58.9 17.397,58.9 ; 21.95,42.5 31.7,42.5 32.297,41.903 32.297,38.8 34.596,38.8 37.5,38.8 38,39.3 42.8,39.3 45.9,39.3 46.38,38.82 46.38,37.2 ; 21.95,62.9 31.7,62.9 32.297,62.303 32.297,59.2 34.596,59.2 37.5,59.2 38,59.7 42.8,59.7 45.9,59.7 46.38,59.22 46.38,57.6 ; 22.068,30.56 22.068,29.168 21.8,28.9 20.3,28.9 20.3,27.21 19.97,26.88 6.32,26.88 5.7,27.5 5.7,30.02 ; 22.068,34.37 22.068,34.539 21.903,34.703 21.903,36.5 ; 22.068,50.96 22.068,49.568 21.8,49.3 20.3,49.3 20.3,47.61 19.97,47.28 6.32,47.28 5.7,47.9 5.7,50.42 ; 22.068,54.77 22.068,54.939 21.903,55.103 21.903,56.9 ; v1(23.75,37.3) 23.75,36.82 23.43,36.5 21.903,36.5 ; v1(23.75,57.7) 23.75,57.22 23.43,56.9 21.903,56.9 ; v1(29.3,37.3) 29.3,37.1 29.6,36.8 32.3,36.8 34.6,36.8 ; v1(29.3,57.7) 29.3,57.5 29.6,57.2 32.3,57.2 34.6,57.2 ; v1(30.2,25.9) 30.7,26.4 32.403,26.4 34.9,26.4 37.303,26.4 ; v1(30.2,46.3) 30.7,46.8 32.403,46.8 34.9,46.8 37.303,46.8 ; 32.98,30.56 32.98,28.42 33,28.4 34.897,28.4 37.3,28.4 40.4,28.4 40.6,28.2 40.6,27.4 40.6,25.9 41.1,25.4 52.2,25.4 52.7,25.9 52.7,28.76 ; 32.98,31.83 35.67,31.83 35.7,31.8 35.7,30.8 ; 32.98,33.1 35.8,33.1 35.8,33.6 ; 32.98,34.37 32.98,36.78 33,36.8 34.6,36.8 ; 32.98,50.96 32.98,48.82 33,48.8 34.897,48.8 37.3,48.8 40.4,48.8 40.6,48.6 40.6,47.8 40.6,46.3 41.1,45.8 52.2,45.8 52.7,46.3 52.7,49.16 ; 32.98,52.23 35.67,52.23 35.7,52.2 35.7,51.2 ; 32.98,53.5 35.8,53.5 35.8,54 ; 32.98,54.77 32.98,57.18 33,57.2 34.6,57.2 ; 38,36.3 37.5,36.8 34.6,36.8 ; 38,56.7 37.5,57.2 34.6,57.2 ; 39.4,33.1 40.2,33.1 41.3,33.1 42.6,33.1 43.1,33.6 43.6,33.6 44.6,34.6 v1(44.6,35.3) ; 39.4,53.5 40.2,53.5 41.3,53.5 42.6,53.5 43.1,54 43.6,54 44.6,55 v1(44.6,55.7) ; 39.7,31.2 41.703,31.2 41.803,31.1 43.2,31.1 43.2,30.9 v2(44.1,30) ; 39.7,51.6 41.703,51.6 41.803,51.5 43.2,51.5 43.2,51.3 v2(44.1,50.4) ; v1(41,36.2) 41.1,36.3 42.8,36.3 ; v1(41,56.6) 41.1,56.7 42.8,56.7 ; 43.9,27.4 45.1,27.4 45.1,29.58 45.104,29.584 45.104,30.416 45.1,30.42 45.1,33.1 45.6,33.6 46.5,33.6 v1(47.7,33.6) ; 43.9,47.8 45.1,47.8 45.1,49.98 45.104,49.984 45.104,50.816 45.1,50.82 45.1,53.5 45.6,54 46.5,54 v1(47.7,54) ; v1(44.6,37.1) 44.7,37.2 46.38,37.2 ; v1(44.6,57.5) 44.7,57.6 46.38,57.6 ; v1(45.503,42.003) 45.503,41.997 45.6,41.9 48.68,41.9 48.68,35.92 48.7,35.9 ; v1(45.503,62.403) 45.503,62.397 45.6,62.3 48.68,62.3 48.68,56.32 48.7,56.3 ; 46.38,35.9 46.38,37.2 ; 46.38,56.3 46.38,57.6 ; v1@47.2,27.1 47.3,27.2 47.3,31.1 ; v1@47.2,47.5 47.3,47.6 47.3,51.5 ; 49.1,33.6 49.1,31.014 49.114,31 ; 49.1,54 49.1,51.414 49.114,51.4 ; 50.98,35.9 51.28,36.2 52.3,36.2 ; 50.98,56.3 51.28,56.6 52.3,56.6 ; 51.4,31 51.4,29 51.64,28.76 52.7,28.76 ; 51.4,51.4 51.4,49.4 51.64,49.16 52.7,49.16 ; 52.5,33.6 52.3,33.8 52.3,36.2 ; 52.5,54 52.3,54.2 52.3,56.6 ; 54.3,36.38 54.12,36.2 52.3,36.2 ; 54.3,56.78 54.12,56.6 52.3,56.6 ; 54.6,33.84 54.7,33.84 56.16,33.84 56.5,33.5 56.5,29.4 55.86,28.76 54.7,28.76 52.7,28.76 ; 54.6,54.24 54.7,54.24 56.16,54.24 56.5,53.9 56.5,49.8 55.86,49.16 54.7,49.16 52.7,49.16 ; 5.7,30.02 3.28,30.02 2.7,30.6 2.7,42.4 4.3,44 13.2,44 ; 5.7,50.42 3.28,50.42 2.7,51 2.7,62.8 4.3,64.4 13.2,64.4 ; 11.3,38.114 12.214,37.2 11.8,37.2 11.3,37.7 11.3,38.114 ; 11.3,58.514 11.3,58.1 11.8,57.6 12.214,57.6 11.3,58.514 ; 13.2,44 16.6,44 16.9,43.7 16.9,42.5 16.9,38.997 17.397,38.5 ; 13.2,64.4 16.6,64.4 16.9,64.1 16.9,62.9 16.9,59.397 17.397,58.9
  Bottom Layer w0.5: 5.7,35.1 3.69,35.1 3.12,34.53 3.12,28.31 4.97,26.46 20.71,26.46 21.7,27.45 21.7,31 20.9,31.8 17.2,31.8 ; 5.7,55.5 3.69,55.5 3.12,54.93 3.12,48.71 4.97,46.86 20.71,46.86 21.7,47.85 21.7,51.4 20.9,52.2 17.2,52.2 ; v1(8.36,39.11) 19.15,39.11 20.19,38.07 20.19,34.83 19.56,34.2 17.2,34.2 ; v1(8.36,59.51) 19.15,59.51 20.19,58.47 20.19,55.23 19.56,54.6 17.2,54.6 ; 9.8,28.4 12.3,28.4 ; 9.8,31.8 9.8,34.2 ; 9.8,37.6 12.3,37.6 ; 9.8,48.8 12.3,48.8 ; 9.8,52.2 9.8,54.6 ; 9.8,58 12.3,58 ; 12.3,31.8 14.8,31.8 ; 12.3,34.2 14.8,34.2 ; 12.3,52.2 14.8,52.2 ; 12.3,54.6 14.8,54.6 ; 14.36,42.5 14.36,40.94 14.76,40.54 21.73,40.54 23.75,38.52 v1(23.75,37.3) ; 14.36,62.9 14.36,61.34 14.76,60.94 21.73,60.94 23.75,58.92 v1(23.75,57.7) ; 14.8,28.4 17.2,28.4 ; 14.8,37.6 17.2,37.6 ; 14.8,48.8 17.2,48.8 ; 14.8,58 17.2,58 ; 19.45,42.5 19.45,43.85 19.75,44.15 29.3,44.15 ; 19.45,62.9 19.45,64.25 19.75,64.55 29.3,64.55 ; v1(29.3,37.3) 29.3,44.15 ; v1(29.3,57.7) 29.3,64.55 ; v1(30.2,25.9) 35.1,25.9 ; v1(30.2,46.3) 35.1,46.3 ; v2(44.1,30) 46.85,30 47.5,29.35 ; v2(44.1,50.4) 46.85,50.4 47.5,49.75 ; v1(44.6,35.3) 42.5,35.3 41.5,34.3 41.5,30.3 42.804,28.996 44.516,28.996 44.52,29 45.6,29 46.2,28.4 46.2,28.3 49.6,28.3 49.89,28.59 49.89,29.35 ; v1(44.6,37.1) 44.6,38 45.1,38.5 45.5,38.5 45.6,38.6 50,38.6 51.6,38.6 ; v1(44.6,55.7) 42.5,55.7 41.5,54.7 41.5,50.7 42.804,49.396 44.516,49.396 44.52,49.4 45.6,49.4 46.2,48.8 46.2,48.7 49.6,48.7 49.89,48.99 49.89,49.75 ; v1(44.6,57.5) 44.6,58.4 45.1,58.9 45.5,58.9 45.6,59 50,59 51.6,59 ; 45.503,40.5 v1(45.503,42.003) 42.003,42.003 41,41 v1(41,36.2) 36.4,36.2 35.1,34.9 35.1,25.9 ; 45.503,60.9 v1(45.503,62.403) 42.003,62.403 41,61.4 v1(41,56.6) 36.4,56.6 35.1,55.3 35.1,46.3 ; v1(47.3,27) 47.3,26.4 46.8,25.9 35.1,25.9 ; v1(47.3,47.4) 47.3,46.8 46.8,46.3 35.1,46.3 ; 47.5,31.25 46.55,31.25 46.25,31.55 46.25,38.5 47.7,38.5 ; 47.5,51.65 46.55,51.65 46.25,51.95 46.25,58.9 47.7,58.9 ; v1(47.7,33.6) 49.5,33.6 49.9,33.2 49.9,31.25 54.25,31.25 54.3,31.3 ; v1(47.7,54) 49.5,54 49.9,53.6 49.9,51.65 54.25,51.65 54.3,51.7 ; 47.703,40.5 49.903,40.5 50.003,40.6 54.4,40.6 ; 47.703,60.9 49.903,60.9 50.003,61 54.4,61 ; 49.9,30.3 50.9,30.3 51.78,29.42 51.78,26.82 52.38,26.22 54.3,26.22 ; 49.9,50.7 50.9,50.7 51.78,49.82 51.78,47.22 52.38,46.62 54.3,46.62 ; 54.3,38.92 53.98,38.6 51.6,38.6 ; 54.3,59.32 53.98,59 51.6,59 ; 54.6,26.22 54.3,26.22 ; 54.6,33.84 52.1,33.84 51.6,34.34 51.6,38.6 ; 54.6,36.38 54.7,36.38 56.58,36.38 ; 54.6,46.62 54.3,46.62 ; 54.6,54.24 52.1,54.24 51.6,54.74 51.6,59 ; 54.6,56.78 54.7,56.78 56.58,56.78 ; 29.3,44.15 53.55,44.15 54.4,43.3 54.4,40.6 ; 29.3,64.55 53.55,64.55 54.4,63.7 54.4,61 ; 54.3,26.22 54.5,26.02 56.42,26.02 56.8,26.4 56.8,39.9 56.1,40.6 54.4,40.6 ; 54.3,46.62 54.5,46.42 56.42,46.42 56.8,46.8 56.8,60.3 56.1,61 54.4,61

## Keep-outs
Keep-Out Layer:
  lines w0.05: 0,0 0,16.4 0,69.4 59.5,69.4 59.5,0 0,0

## Other copper
Top Layer:
  region: 13.8,58.3 13.8,58.7 14.2,58.7 16.25,58.7 16.25,58.2 15.5,58.2 15.5,56.9 13.8,56.9
  region: 15.3,59.2 13.6,59.2 13.6,63.6 13.7,63.7 15.3,63.7
  region: 55.6,55.9 55.6,57.6 50.4,57.6 50.4,55.6 50.5,55.5 51.2,55.5 51.2,53.8 51.2,53.1 51.9,53.1 53.3,53.1 53.3,55.9
  region: 34.1,54.5 32.1,54.5 27.7,54.5 27.7,60.4 30.3,60.4 30.3,57.7 38.7,57.7 38.7,55.7 34.1,55.7
  region: 38,52.3 44,52.3 44.3,52 44.3,50.2 38,50.2
  region: 29.1,45.4 29.1,47.2 29.2,47.3 38.2,47.3 38.2,45.5 38.3,45.4
  region: 50.2,54.8 48.8,54.8 48.8,50.7 50.2,50.7
  region: 48.2,54.8 45.8,54.8 44.9,53.9 44.9,48.7 44.8,48.6 42.9,48.6 42.8,48.5 42.8,47 45.5,47 45.5,52.9 48.2,52.9
  region: 38.1,53.1 38.1,55.1 44,55.1 44,56.2 45.2,56.2 45.3,56.1 45.2,56 45.2,55 45,55 43.7,53.7 43.7,53.1
  region: 46.1,52.2 46.1,46.9 48.5,46.9 48.7,46.9 48.7,47.1 48.7,50.1 48.1,50.1 48.1,52.2
  region: 43.3,55.7 40.1,55.7 40,55.8 40,57.7 43.3,57.7
  region: 48.1,55.5 48.1,61.4 47.2,61.4 47.1,61.5 47.1,61.9 45.1,61.9 44.7,62.3 44.7,64.2 51.9,64.2 52.1,64 51.8,63.7 51.8,61.1 49.3,61.1 49.3,55.5
  region: 30.1,48.1 30.1,51.3 33.8,51.3 34.1,51 34.1,49.5 41.4,49.5 41.7,49.2 41.7,46.1 41.8,46.2 49.4,46.2 49.4,50.1 51.1,50.1 51.1,52.1 51.2,52.2 51.3,52.1 52.7,52.1 52.7,50.2 53,49.9 53.1,50 56.1,50 56.2,50.1 56.2,53.4 54.1,53.4 53.9,53.6 53.9,55 54,55.1 58.1,55.1 58.4,54.8 58.4,48.1 54.4,48.1 53.3,48.1 53.3,45.6 52.9,45.2 39.5,45.2 39.5,47.9 30.3,47.9
  region: 21.1,61 21.1,64.6 21.2,64.7 35.4,64.7 43,64.7 43,61.1 46.2,61.1 47.3,60 47.3,55.3 46.1,55.3 46,55.4 46,56.9 44.3,56.9 44.2,57 44.2,58.6 31.1,58.6 31.1,61
  region: 18.9,48.6 15.9,48.6 15.9,52.6 23,52.6 23.1,52.5 23.1,51.9 20.1,51.9 20.1,51.4 18.9,51.4
  region: 15.9,53.1 15.9,57.6 18.5,57.6 18.5,54.3 20.2,54.3 20.2,53.9 20.2,53.8 20.3,53.8 23,53.8 23,53.2 22.9,53.1
  region: 10.6,56.9 10.6,61 12.8,61 12.8,56.9
  region: 7.9,53.1 7.5,53.5 7.5,60.9 7.5,61 8.5,61 10.1,61 10.1,60.9 10.1,60.3 10.1,56 14.8,56 14.8,53.1
  region: 4,52.5 14.8,52.5 14.8,48 19.8,48 19.7,48.1 19.7,50.3 21.1,50.3 21.2,50.4 21.2,51.3 23.1,51.3 23.3,51.1 23.3,45.7 23,45.4 22.9,45.5 2,45.5 0.6,45.5 0.6,47.1 0.6,47.5 0.6,64.6 1.1,65.1 17.1,65.1 17.7,65.1 17.7,64.1 17.7,63.7 17.7,62.1 16.2,62.1 16.1,62 16,62.1 16,64.1 13.1,64.1 13.1,61.5 12.6,61.5 12.4,61.5 5.7,61.5 4,61.5
  region: 16,63.6 16,58.2 16.5,58.2 22.6,58.2 22.6,59.1 22.6,60.4 21.3,60.4 20.6,60.4 20.6,61.6 17.7,61.6 17.7,63.5 17.6,63.6
  region: 22.9,54.5 21.1,54.5 21,54.6 21,55.4 19.5,55.4 19,55.4 19,57.4 23.1,57.4 23.1,60.4 26.1,60.4 26.1,54.5
  region: 22.9,34.1 21.1,34.1 21,34.2 21,35 19.5,35 19,35 19,37 23.1,37 23.1,40 26.1,40 26.1,34.1
  region: 16,43.2 16,37.8 16.5,37.8 22.6,37.8 22.6,38.7 22.6,40 21.3,40 20.6,40 20.6,41.2 17.7,41.2 17.7,43.1 17.6,43.2
  region: 4,32.1 14.8,32.1 14.8,27.6 19.8,27.6 19.7,27.7 19.7,29.9 21.1,29.9 21.2,30 21.2,30.9 23.1,30.9 23.3,30.7 23.3,25.3 23,25 22.9,25.1 2,25.1 0.6,25.1 0.6,26.7 0.6,27.1 0.6,44.2 1.1,44.7 17.1,44.7 17.7,44.7 17.7,43.7 17.7,43.3 17.7,41.7 16.2,41.7 16.1,41.6 16,41.7 16,43.7 13.1,43.7 13.1,41.1 12.6,41.1 12.4,41.1 5.7,41.1 4,41.1
  region: 7.9,32.7 7.5,33.1 7.5,40.5 7.5,40.6 8.5,40.6 10.1,40.6 10.1,40.5 10.1,39.9 10.1,35.6 14.8,35.6 14.8,32.7
  region: 10.6,36.5 10.6,40.6 12.8,40.6 12.8,36.5
  region: 15.9,32.7 15.9,37.2 18.5,37.2 18.5,33.9 20.2,33.9 20.2,33.5 20.2,33.4 20.3,33.4 23,33.4 23,32.8 22.9,32.7
  region: 18.9,28.2 15.9,28.2 15.9,32.2 23,32.2 23.1,32.1 23.1,31.5 20.1,31.5 20.1,31 18.9,31
  region: 21.1,40.6 21.1,44.2 21.2,44.3 35.4,44.3 43,44.3 43,40.7 46.2,40.7 47.3,39.6 47.3,34.9 46.1,34.9 46,35 46,36.5 44.3,36.5 44.2,36.6 44.2,38.2 31.1,38.2 31.1,40.6
  region: 30.1,27.7 30.1,30.9 33.8,30.9 34.1,30.6 34.1,29.1 41.4,29.1 41.7,28.8 41.7,25.7 41.8,25.8 49.4,25.8 49.4,29.7 51.1,29.7 51.1,31.7 51.2,31.8 51.3,31.7 52.7,31.7 52.7,29.8 53,29.5 53.1,29.6 56.1,29.6 56.2,29.7 56.2,33 54.1,33 53.9,33.2 53.9,34.6 54,34.7 58.1,34.7 58.4,34.4 58.4,27.7 54.4,27.7 53.3,27.7 53.3,25.2 52.9,24.8 39.5,24.8 39.5,27.5 30.3,27.5
  region: 48.1,35.1 48.1,41 47.2,41 47.1,41.1 47.1,41.5 45.1,41.5 44.7,41.9 44.7,43.8 51.9,43.8 52.1,43.6 51.8,43.3 51.8,40.7 49.3,40.7 49.3,35.1
  region: 43.3,35.3 40.1,35.3 40,35.4 40,37.3 43.3,37.3
  region: 46.1,31.8 46.1,26.5 48.5,26.5 48.7,26.5 48.7,26.7 48.7,29.7 48.1,29.7 48.1,31.8
  region: 38.1,32.7 38.1,34.7 44,34.7 44,35.8 45.2,35.8 45.3,35.7 45.2,35.6 45.2,34.6 45,34.6 43.7,33.3 43.7,32.7
  region: 48.2,34.4 45.8,34.4 44.9,33.5 44.9,28.3 44.8,28.2 42.9,28.2 42.8,28.1 42.8,26.6 45.5,26.6 45.5,32.5 48.2,32.5
  region: 50.2,34.4 48.8,34.4 48.8,30.3 50.2,30.3
  region: 29.1,25 29.1,26.8 29.2,26.9 38.2,26.9 38.2,25.1 38.3,25
  region: 38,31.9 44,31.9 44.3,31.6 44.3,29.8 38,29.8
  region: 34.1,34.1 32.1,34.1 27.7,34.1 27.7,40 30.3,40 30.3,37.3 38.7,37.3 38.7,35.3 34.1,35.3
  region: 55.6,35.5 55.6,37.2 50.4,37.2 50.4,35.2 50.5,35.1 51.2,35.1 51.2,33.4 51.2,32.7 51.9,32.7 53.3,32.7 53.3,35.5
  region: 15.3,38.8 13.6,38.8 13.6,43.2 13.7,43.3 15.3,43.3
  region: 13.8,37.9 13.8,38.3 14.2,38.3 16.25,38.3 16.25,37.8 15.5,37.8 15.5,36.5 13.8,36.5
  region net GND_P: 13.9,17.1 13.9,17.5 14.3,17.5 16.35,17.5 16.35,17 15.6,17 15.6,15.7 13.9,15.7
  region net NetC1_1: 15.4,18 13.7,18 13.7,22.4 13.8,22.5 15.4,22.5
  region net NetC2_2: 55.7,14.7 55.7,16.4 50.5,16.4 50.5,14.4 50.6,14.3 51.3,14.3 51.3,12.6 51.3,11.9 52,11.9 53.4,11.9 53.4,14.7
  region net NetC2_2: 34.2,13.3 32.2,13.3 27.8,13.3 27.8,19.2 30.4,19.2 30.4,16.5 38.8,16.5 38.8,14.5 34.2,14.5
  region net NetC7_1: 38.1,11.1 44.1,11.1 44.4,10.8 44.4,9 38.1,9
  region net NetC10_1: 29.2,4.2 29.2,6 29.3,6.1 38.3,6.1 38.3,4.3 38.4,4.2
  region net NetL1_1: 50.3,13.6 48.9,13.6 48.9,9.5 50.3,9.5
  region net NetJP1_3: 48.3,13.6 45.9,13.6 45,12.7 45,7.5 44.9,7.4 43,7.4 42.9,7.3 42.9,5.8 45.6,5.8 45.6,11.7 48.3,11.7
  region net NetC7_2: 38.2,11.9 38.2,13.9 44.1,13.9 44.1,15 45.3,15 45.4,14.9 45.3,14.8 45.3,13.8 45.1,13.8 43.8,12.5 43.8,11.9
  region net NetC10_1: 46.2,11 46.2,5.7 48.6,5.7 48.8,5.7 48.8,5.9 48.8,8.9 48.2,8.9 48.2,11
  region net NetC10_1: 43.4,14.5 40.2,14.5 40.1,14.6 40.1,16.5 43.4,16.5
  region net NetC10_1: 48.2,14.3 48.2,20.2 47.3,20.2 47.2,20.3 47.2,20.7 45.2,20.7 44.8,21.1 44.8,23 52,23 52.2,22.8 51.9,22.5 51.9,19.9 49.4,19.9 49.4,14.3
  region net GND_D: 30.2,6.9 30.2,10.1 33.9,10.1 34.2,9.8 34.2,8.3 41.5,8.3 41.8,8 41.8,4.9 41.9,5 49.5,5 49.5,8.9 51.2,8.9 51.2,10.9 51.3,11 51.4,10.9 52.8,10.9 52.8,9 53.1,8.7 53.2,8.8 56.2,8.8 56.3,8.9 56.3,12.2 54.2,12.2 54,12.4 54,13.8 54.1,13.9 58.2,13.9 58.5,13.6 58.5,6.9 54.5,6.9 53.4,6.9 53.4,4.4 53,4 39.6,4 39.6,6.7 30.4,6.7
  region net GND_D: 21.2,19.8 21.2,23.4 21.3,23.5 35.5,23.5 43.1,23.5 43.1,19.9 46.3,19.9 47.4,18.8 47.4,14.1 46.2,14.1 46.1,14.2 46.1,15.7 44.4,15.7 44.3,15.8 44.3,17.4 31.2,17.4 31.2,19.8
  region net NetC5_1: 19,7.4 16,7.4 16,11.4 23.1,11.4 23.2,11.3 23.2,10.7 20.2,10.7 20.2,10.2 19,10.2
  region net NetC6_1: 16,11.9 16,16.4 18.6,16.4 18.6,13.1 20.3,13.1 20.3,12.7 20.3,12.6 20.4,12.6 23.1,12.6 23.1,12 23,11.9
  region net NetL2_1: 10.7,15.7 10.7,19.8 12.9,19.8 12.9,15.7
  region net NetR5_2: 8,11.9 7.6,12.3 7.6,19.7 7.6,19.8 8.6,19.8 10.2,19.8 10.2,19.7 10.2,19.1 10.2,14.8 14.9,14.8 14.9,11.9
  region net GND_P: 4.1,11.3 14.9,11.3 14.9,6.8 19.9,6.8 19.8,6.9 19.8,9.1 21.2,9.1 21.3,9.2 21.3,10.1 23.2,10.1 23.4,9.9 23.4,4.5 23.1,4.2 23,4.3 0.7,4.3 0.7,5.9 0.7,6.3 0.7,23.4 1.2,23.9 17.2,23.9 17.8,23.9 17.8,22.9 17.8,22.5 17.8,20.9 16.3,20.9 16.2,20.8 16.1,20.9 16.1,22.9 13.2,22.9 13.2,20.3 12.7,20.3 12.5,20.3 5.8,20.3 4.1,20.3
  region net GND_P: 16.1,22.4 16.1,17 16.6,17 22.7,17 22.7,17.9 22.7,19.2 21.4,19.2 20.7,19.2 20.7,20.4 17.8,20.4 17.8,22.3 17.7,22.4
  region net NetC1_1: 23,13.3 21.2,13.3 21.1,13.4 21.1,14.2 19.6,14.2 19.1,14.2 19.1,16.2 23.2,16.2 23.2,19.2 26.2,19.2 26.2,13.3
Bottom Layer:
  region: 47.9,49.5 47.9,50.7 44.5,50.7 44.5,50.9 43.6,50.9 43.6,50.1 46.6,50.1 46.8,49.9 46.8,49.5
  region: 18.6,62.1 18.6,65.1 18.7,65 55.1,65 58.1,65 58.1,62 58.1,45.8 57.8,45.5 57.7,45.6 51.5,45.6 51.5,46.4 51.2,46.7 51.2,50 51.4,50.2 51.2,50.4 51.2,50.9 52.4,50.9 52.6,50.7 52.6,47.6 52.8,47.4 52.9,47.5 56.3,47.5 56.3,56 56.2,55.9 53.7,55.9 53.7,57.6 56.2,57.6 56.4,57.8 56.4,60.2 55.9,60.7 53.2,60.7 53.2,60.1 47.1,60.1 47.1,63.8 39.111,63.8 39.111,58.7 32.5,58.7 32.5,56.1 27.6,56.1 27.6,64.1 20.5,64.1 20.5,62.1
  region: 48.092,47.9 46.8,47.9 46.8,46.8 46.6,46.6 39,46.6 39,55.8 41,55.8 41.6,56.4 41.6,60.5 42.2,60.5 46.1,60.5 46.1,62.9 45.9,63.1 39.9,63.1 39.9,57.7 39.7,57.5 39.6,57.6 33.5,57.6 33.5,47.3 28.4,47.3 28.4,45.6 28.8,45.2 28.9,45.3 48.2,45.3
  region: 45.1,55.1 45.1,56.3 42.55,56.3 41.427,55 39.9,55 39.9,53.473 39.9,51.613 39.9,49 42.7,49 45.5,49 46.1,48.5 50.7,48.5 50.7,49.8 50.5,50 49.5,50 49.5,49 46.4,49 45.7,49.7 43.1,49.7 42.4,50.4 42.4,51.4 45.1,51.4
  region: 55.6,53.3 55.6,55.1 55.5,55.2 53,55.2 53,58.4 55.6,58.4 55.6,60 55.6,60.2 54.3,60.2 53.6,60.2 53.6,60.1 53.6,59.4 52.6,59.4 44,59.4 44,57 44.1,56.9 45.8,56.9 45.8,51.6 46.1,51.3 47.9,51.3 47.9,52 47.6,52.3 46.6,52.3 46.5,52.4 46.6,52.5 46.6,55.1 51.2,55.1 51.2,53.3
  region: 55.5,50.9 55.5,52.5 50.5,52.5 50.5,53.8 49.7,54.6 47.2,54.6 47.2,53.5 47.3,53.4 49.3,53.4 49.5,53.2 49.5,51.4 53.6,51.4 53.6,50.9
  region: 16.5,54 16.5,55.2 16.6,55.3 19.1,55.3 19.1,59 19.1,59.1 7.7,59.1 5.7,59.1 5.7,61.1 5.7,62.2 11.2,62.2 11.4,62 11.4,60 20.4,60 21.1,59.3 21.1,54
  region: 12.3,64.1 12.3,60.5 21.2,60.5 21.9,59.8 21.9,56.6 26.1,56.6 26.7,57.2 26.7,61.3 26.5,61.5 15.2,61.5 15.2,64.1
  region: 13.2,58.6 9.2,58.6 8.8,58.6 8.8,58.2 8.8,56.7 13.2,56.7
  region: 18,58.6 14,58.6 13.9,58.5 14,58.4 14,56.6 18,56.6
  region: 15.6,55.7 12,55.7 11.5,55.7 11.5,55.2 11.5,53.8 15.6,53.8
  region: 10.7,51.5 10.7,55.3 10.4,55.6 10.3,55.5 8.9,55.5 8.9,51.5
  region: 11.5,51.6 15.5,51.6 15.7,51.8 15.7,53.1 11.5,53.1
  region: 8.8,48.1 13,48.1 13.1,48.2 13.1,50 8.8,50
  region: 13.9,48.1 18,48.1 18.2,48.3 18.2,50 13.9,50
  region: 7.6,53.6 7.6,57.6 7.6,58.1 7.1,58.1 0.6,58.1 0.6,47.5 0.6,45.5 2.6,45.5 22.7,45.5 22.7,53 22.5,53.2 17.3,53.2 16.4,53.2 16.4,52.8 16.4,51.7 16.4,51.5 16.4,50.8 17.7,50.8 19,50.8 19,47.6 5.1,47.6 3.9,48.8 3.9,53.6
  region: 7.6,33.2 7.6,37.2 7.6,37.7 7.1,37.7 0.6,37.7 0.6,27.1 0.6,25.1 2.6,25.1 22.7,25.1 22.7,32.6 22.5,32.8 17.3,32.8 16.4,32.8 16.4,32.4 16.4,31.3 16.4,31.1 16.4,30.4 17.7,30.4 19,30.4 19,27.2 5.1,27.2 3.9,28.4 3.9,33.2
  region: 13.9,27.7 18,27.7 18.2,27.9 18.2,29.6 13.9,29.6
  region: 8.8,27.7 13,27.7 13.1,27.8 13.1,29.6 8.8,29.6
  region: 11.5,31.2 15.5,31.2 15.7,31.4 15.7,32.7 11.5,32.7
  region: 10.7,31.1 10.7,34.9 10.4,35.2 10.3,35.1 8.9,35.1 8.9,31.1
  region: 15.6,35.3 12,35.3 11.5,35.3 11.5,34.8 11.5,33.4 15.6,33.4
  region: 18,38.2 14,38.2 13.9,38.1 14,38 14,36.2 18,36.2
  region: 13.2,38.2 9.2,38.2 8.8,38.2 8.8,37.8 8.8,36.3 13.2,36.3
  region: 12.3,43.7 12.3,40.1 21.2,40.1 21.9,39.4 21.9,36.2 26.1,36.2 26.7,36.8 26.7,40.9 26.5,41.1 15.2,41.1 15.2,43.7
  region: 16.5,33.6 16.5,34.8 16.6,34.9 19.1,34.9 19.1,38.6 19.1,38.7 7.7,38.7 5.7,38.7 5.7,40.7 5.7,41.8 11.2,41.8 11.4,41.6 11.4,39.6 20.4,39.6 21.1,38.9 21.1,33.6
  region: 55.5,30.5 55.5,32.1 50.5,32.1 50.5,33.4 49.7,34.2 47.2,34.2 47.2,33.1 47.3,33 49.3,33 49.5,32.8 49.5,31 53.6,31 53.6,30.5
  region: 55.6,32.9 55.6,34.7 55.5,34.8 53,34.8 53,38 55.6,38 55.6,39.6 55.6,39.8 54.3,39.8 53.6,39.8 53.6,39.7 53.6,39 52.6,39 44,39 44,36.6 44.1,36.5 45.8,36.5 45.8,31.2 46.1,30.9 47.9,30.9 47.9,31.6 47.6,31.9 46.6,31.9 46.5,32 46.6,32.1 46.6,34.7 51.2,34.7 51.2,32.9
  region: 45.1,34.7 45.1,35.9 42.55,35.9 41.427,34.6 39.9,34.6 39.9,33.073 39.9,31.213 39.9,28.6 42.7,28.6 45.5,28.6 46.1,28.1 50.7,28.1 50.7,29.4 50.5,29.6 49.5,29.6 49.5,28.6 46.4,28.6 45.7,29.3 43.1,29.3 42.4,30 42.4,31 45.1,31
  region: 48.092,27.5 46.8,27.5 46.8,26.4 46.6,26.2 39,26.2 39,35.4 41,35.4 41.6,36 41.6,40.1 42.2,40.1 46.1,40.1 46.1,42.5 45.9,42.7 39.9,42.7 39.9,37.3 39.7,37.1 39.6,37.2 33.5,37.2 33.5,26.9 28.4,26.9 28.4,25.2 28.8,24.8 28.9,24.9 48.2,24.9
  region: 18.6,41.7 18.6,44.7 18.7,44.6 55.1,44.6 58.1,44.6 58.1,41.6 58.1,25.4 57.8,25.1 57.7,25.2 51.5,25.2 51.5,26 51.2,26.3 51.2,29.6 51.4,29.8 51.2,30 51.2,30.5 52.4,30.5 52.6,30.3 52.6,27.2 52.8,27 52.9,27.1 56.3,27.1 56.3,35.6 56.2,35.5 53.7,35.5 53.7,37.2 56.2,37.2 56.4,37.4 56.4,39.8 55.9,40.3 53.2,40.3 53.2,39.7 47.1,39.7 47.1,43.4 39.111,43.4 39.111,38.3 32.5,38.3 32.5,35.7 27.6,35.7 27.6,43.7 20.5,43.7 20.5,41.7
  region: 47.9,29.1 47.9,30.3 44.5,30.3 44.5,30.5 43.6,30.5 43.6,29.7 46.6,29.7 46.8,29.5 46.8,29.1
  region net NetC7_1: 48,8.3 48,9.5 44.6,9.5 44.6,9.7 43.7,9.7 43.7,8.9 46.7,8.9 46.9,8.7 46.9,8.3
  region net NetC2_2: 18.7,20.9 18.7,23.9 18.8,23.8 55.2,23.8 58.2,23.8 58.2,20.8 58.2,4.6 57.9,4.3 57.8,4.4 51.6,4.4 51.6,5.2 51.3,5.5 51.3,8.8 51.5,9 51.3,9.2 51.3,9.7 52.5,9.7 52.7,9.5 52.7,6.4 52.9,6.2 53,6.3 56.4,6.3 56.4,14.8 56.3,14.7 53.8,14.7 53.8,16.4 56.3,16.4 56.5,16.6 56.5,19 56,19.5 53.3,19.5 53.3,18.9 47.2,18.9 47.2,22.6 39.211,22.6 39.211,17.5 32.6,17.5 32.6,14.9 27.7,14.9 27.7,22.9 20.6,22.9 20.6,20.9
  region net NetC10_1: 48.192,6.7 46.9,6.7 46.9,5.6 46.7,5.4 39.1,5.4 39.1,14.6 41.1,14.6 41.7,15.2 41.7,19.3 42.3,19.3 46.2,19.3 46.2,21.7 46,21.9 40,21.9 40,16.5 39.8,16.3 39.7,16.4 33.6,16.4 33.6,6.1 28.5,6.1 28.5,4.4 28.9,4 29,4.1 48.3,4.1
  region net NetC7_2: 45.2,13.9 45.2,15.1 42.65,15.1 41.527,13.8 40,13.8 40,12.273 40,10.413 40,7.8 42.8,7.8 45.6,7.8 46.2,7.3 50.8,7.3 50.8,8.6 50.6,8.8 49.6,8.8 49.6,7.8 46.5,7.8 45.8,8.5 43.2,8.5 42.5,9.2 42.5,10.2 45.2,10.2
  region net GND_D: 55.7,12.1 55.7,13.9 55.6,14 53.1,14 53.1,17.2 55.7,17.2 55.7,18.8 55.7,19 54.4,19 53.7,19 53.7,18.9 53.7,18.2 52.7,18.2 44.1,18.2 44.1,15.8 44.2,15.7 45.9,15.7 45.9,10.4 46.2,10.1 48,10.1 48,10.8 47.7,11.1 46.7,11.1 46.6,11.2 46.7,11.3 46.7,13.9 51.3,13.9 51.3,12.1
  region net NetJP1_3: 55.6,9.7 55.6,11.3 50.6,11.3 50.6,12.6 49.8,13.4 47.3,13.4 47.3,12.3 47.4,12.2 49.4,12.2 49.6,12 49.6,10.2 53.7,10.2 53.7,9.7
  region net NetR5_2: 16.6,12.8 16.6,14 16.7,14.1 19.2,14.1 19.2,17.8 19.2,17.9 7.8,17.9 5.8,17.9 5.8,19.9 5.8,21 11.3,21 11.5,20.8 11.5,18.8 20.5,18.8 21.2,18.1 21.2,12.8
  region net NetC1_1: 12.4,22.9 12.4,19.3 21.3,19.3 22,18.6 22,15.4 26.2,15.4 26.8,16 26.8,20.1 26.6,20.3 15.3,20.3 15.3,22.9
  region net NetR11_2: 13.3,17.4 9.3,17.4 8.9,17.4 8.9,17 8.9,15.5 13.3,15.5
  region net NetR6_2: 18.1,17.4 14.1,17.4 14,17.3 14.1,17.2 14.1,15.4 18.1,15.4
  region net NetR9_2: 15.7,14.5 12.1,14.5 11.6,14.5 11.6,14 11.6,12.6 15.7,12.6
  region net NetR8_1: 10.8,10.3 10.8,14.1 10.5,14.4 10.4,14.3 9,14.3 9,10.3
  region net NetR10_2: 11.6,10.4 15.6,10.4 15.8,10.6 15.8,11.9 11.6,11.9
  region net NetR8_2: 8.9,6.9 13.1,6.9 13.2,7 13.2,8.8 8.9,8.8
  region net NetR12_2: 14,6.9 18.1,6.9 18.3,7.1 18.3,8.8 14,8.8
  region net NetJ1_1: 7.7,12.4 7.7,16.4 7.7,16.9 7.2,16.9 0.7,16.9 0.7,6.3 0.7,4.3 2.7,4.3 22.8,4.3 22.8,11.8 22.6,12 17.4,12 16.5,12 16.5,11.6 16.5,10.5 16.5,10.3 16.5,9.6 17.8,9.6 19.1,9.6 19.1,6.4 5.2,6.4 4,7.6 4,12.4

## Silkscreen, mask and mechanical layers (free items; w line width, h text height)
Top Overlay:
  lines w0.05: 0,24.3 59.5,24.3 ; 0,44.9 59.5,44.9
  text "G_D" at 56.6,58.9 h0.7
  text "5_D" at 56.4,56.2 h0.7
  text "G_D" at 56.5,53.8 h0.7
  text "ADC" at 56.5,51.5 h0.7
  text "G_D" at 56.6,48.9 h0.7
  text "5_D" at 56.7,46 h0.7
  text "G_D" at 56.6,38.5 h0.7
  text "5_D" at 56.4,35.8 h0.7
  text "G_D" at 56.5,33.4 h0.7
  text "ADC" at 56.5,31.1 h0.7
  text "G_D" at 56.6,28.5 h0.7
  text "5_D" at 56.7,25.6 h0.7
  text "G_D" at 56.7,17.7 h0.7
  text "5_D" at 56.5,15 h0.7
  text "G_D" at 56.6,12.6 h0.7
  text "ADC" at 56.6,10.3 h0.7
  text "G_D" at 56.7,7.7 h0.7
  text "5_D" at 56.8,4.8 h0.7